# EAGLE board Clock (EAGLE 8.2.2)
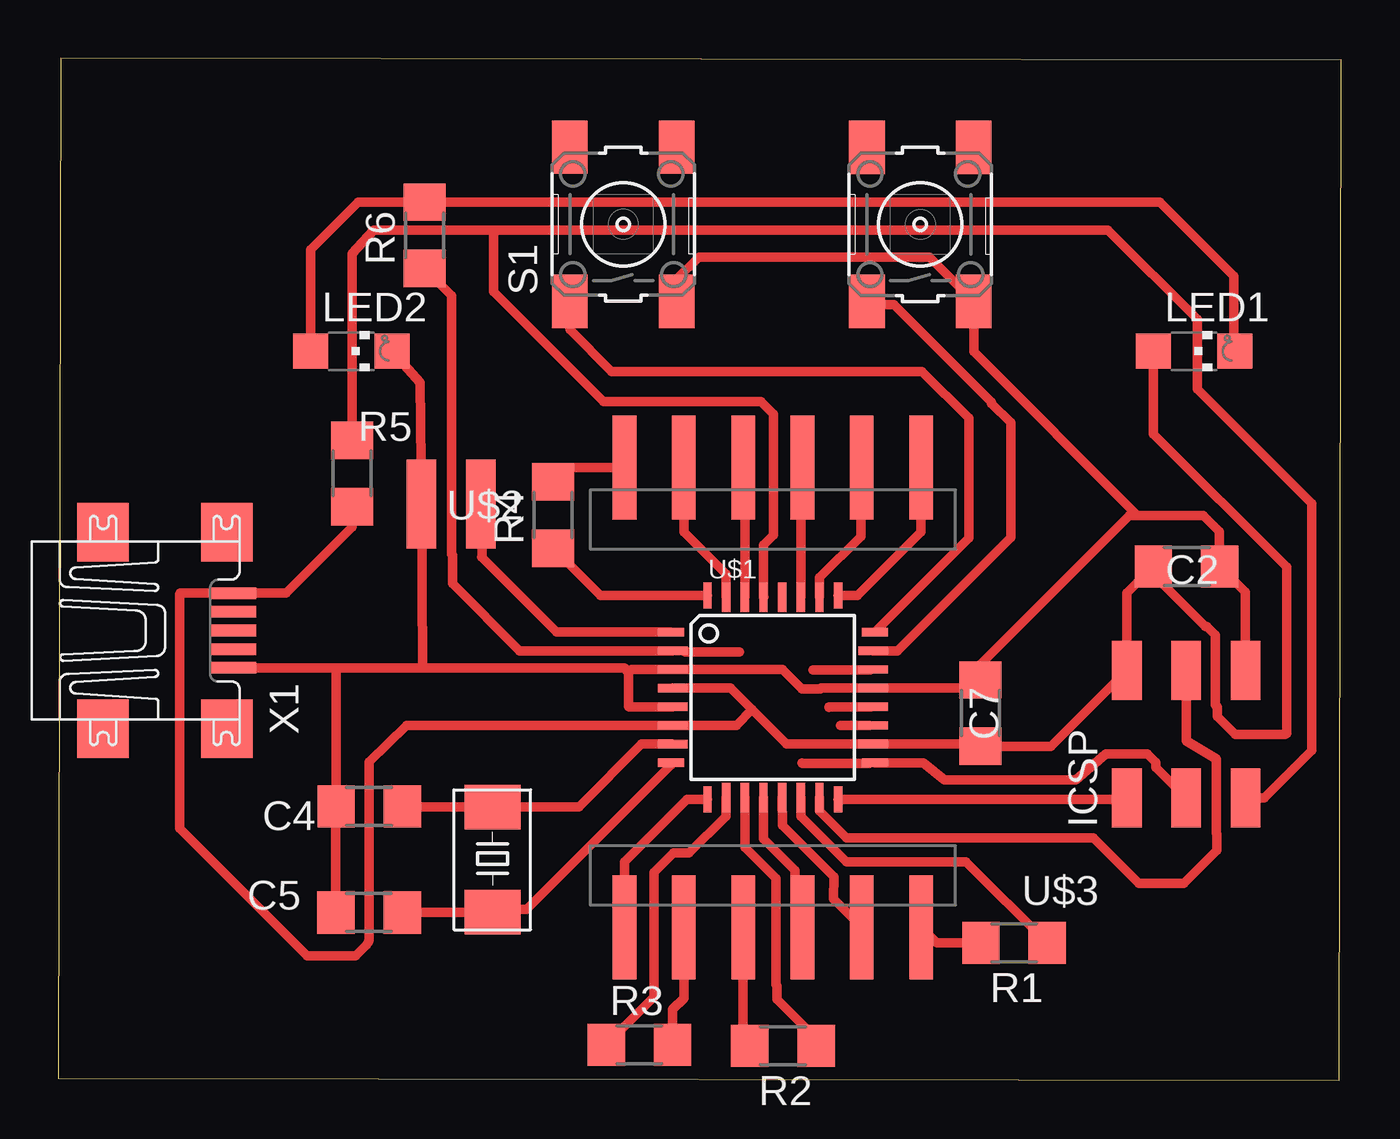
[diagram p0: board, top side]

Size 54.95 x 43.78 mm. Coordinates in mm from the lower left corner, seen from the top.
Outline: 0,0.09 54.87,0 54.95,43.71 0.1,43.79 0,0.09
Copper layers (1*16): Top 0.035mm / dielectric 1.5mm / Bottom 0.035mm
Design rules "default *": minimum track width 10mil, minimum drill 24mil, track to track 8mil, track to pad 8mil, pad to pad 8mil, via to via 8mil, smd to smd 8mil, copper to edge 40mil, drill to drill 8mil, minimum pad ring 12mil, minimum via ring 8mil, stop-mask expansion 4mil, vias tented up to drill 0mil, thermal gap 10mil
Net classes: 0 default: width 0.635 mm, clearance 0.406 mm; 1 power: width 0.635 mm, clearance 0.406 mm

## Footprints (pad centres in the part's own frame; a part is rotated, then mirrored left to right if it is on the bottom)
1206 = smd 1.6 x 1.803: 1 -1.422,0; 2 1.422,0
2X03SMD = smd 2.54 x 1.27: 1 -2.54,2.54; 2 2.92,2.54; 3 -2.54,0; 4 2.92,0; 5 -2.54,-2.54; 6 2.92,-2.54
CHIPLED_1206 = smd 1.5 x 1.5: A 0,-1.75; C 0,1.75
CS10 = smd 1.905 x 2.388: P$1 -2.286,0; P$2 2.21,0
R1206 = smd 1.6 x 1.803: 1 -1.422,0; 2 1.422,0
6MM_SWITCH = smd 2.286 x 1.524: 1 -3.302,2.286; 2 3.302,2.286; 3 -3.302,-2.286; 4 3.302,-2.286
TQFP32-08THIN = smd 1.118 x 0.356: 1 -4.369,2.8; 8 -4.369,-2.8; 17 4.369,-2.8; 24 4.369,2.8 | smd 1.27 x 0.356: 2 -4.293,2; 3 -4.293,1.2; 4 -4.293,0.4; 5 -4.293,-0.4; 6 -4.293,-1.2; 7 -4.293,-2; 18 4.293,-2; 19 4.293,-1.2; 20 4.293,-0.4; 21 4.293,0.4; 22 4.293,1.2; 23 4.293,2 | smd 0.356 x 1.118: 9 -2.8,-4.369; 16 2.8,-4.369; 25 2.8,4.369; 32 -2.8,4.369 | smd 0.356 x 1.27: 10 -2,-4.293; 14 1.2,-4.293; 15 2,-4.293; 26 2,4.293; 27 1.2,4.293; 31 -2,4.293 | smd 0.35 x 1.27: 11 -1.2,-4.293; 12 -0.4,-4.293; 13 0.4,-4.293; 28 0.4,4.293; 29 -0.4,4.293; 30 -1.2,4.293
HEADER = smd 1.016 x 4.445: 1 -6.35,2.223; 2 -3.81,2.223; 3 -1.27,2.223; 4 1.27,2.223; 5 3.81,2.223; 6 6.35,2.223
BUZZER = smd 1.27 x 3.81: P$1 -1.27,0; P$2 1.27,0
UX60A-MB-5ST = smd 2 x 0.5: 1 2.25,1.6; 2 2.25,0.8; 3 2.25,0; 4 2.25,-0.8; 5 2.25,-1.6 | smd 2.2 x 2.5: M1 -3.3,-4.2; M2 -3.3,4.2; M3 2,4.2; M4 2,-4.2

## Placement (x,y rotation side)
C2  10uF  [1206]  48.32,22.02 180 top
C4  18pF  [1206]  13.32,11.74 0 top
C5  18pF  [1206]  13.3,7.19 0 top
C7  .1uF  [1206]  39.5,15.74 270 top
ICSP  PROG  [2X03SMD]  48.31,14.65 90 top
LED1  AM  [CHIPLED_1206]  48.65,31.24 270 top
LED2  PM  [CHIPLED_1206]  12.56,31.24 270 top
Q2  16MHz  [CS10]  18.6,9.5 90 top
R1  [R1206]  40.94,5.89 180 top
R2  [R1206]  31.03,1.48 180 top
R3  [R1206]  24.88,1.53 0 top
R4  [R1206]  21.2,24.23 90 top
R5  10K  [1206]  12.58,26 270 top
R6  [R1206]  15.68,36.21 90 top
S0  HR  [6MM_SWITCH]  36.92,36.68 90 top
S1  MIN  [6MM_SWITCH]  24.2,36.68 90 top
U$1  ATMEGA88-THIN  [TQFP32-08THIN]  30.6,16.41 0 top
U$2  HEADER  [HEADER]  30.6,24.03 0 top
U$3  HEADER  [HEADER]  30.6,8.79 180 top
U$4  BUZZER  [BUZZER]  16.83,24.7 180 top
X1  MINI-USB-UX60A-MB-5ST  [UX60A-MB-5ST]  5.21,19.28 0 top

## Library data of the parts
C2 C4 C5 C7 Q2 R5 S0 S1 = ng
ICSP U$1 = fab
LED1 LED2 = led
R1-R4 R6 = resistor
U$2-U$4 = 4-Digit-Clock
X1 = con-hirose; OC_FARNELL: unknown; OC_NEWARK: unknown

## Nets
A0: S0.1 U$1.23
A1: S1.1 U$1.24
A2: U$1.25 U$2.6
A3: U$1.26 U$2.5
A4: U$1.27 U$2.4
A5: U$1.28
D0: U$1.30 U$2.3
D1: U$1.31 U$2.2
D2: R4.1 U$1.32
D3: U$1.1 U$4.P$1
D4: R6.1 U$1.2
D5: U$1.9 U$3.6
D6: R3.1 U$1.10
D7: R2.1 U$1.11
D8: U$1.12 U$3.3
D9: U$1.13 U$3.2
D10: R1.1 U$1.14
GND [power]: C2.1 C4.1 C5.1 C7.1 ICSP.6 LED2.C S0.3 S1.3 U$1.3 U$1.5 U$1.21 U$4.P$2 X1.5
MISO-D12: ICSP.1 U$1.16
MOSI-D11: ICSP.4 U$1.15
N$1: R1.2 U$3.1
N$2: R2.2 U$3.4
N$3: R3.2 U$3.5
N$4: R4.2 U$2.1
N$5: LED1.C LED2.A R6.2
PB6: C4.2 Q2.P$2 U$1.7
PB7: C5.2 Q2.P$1 U$1.8
RESET: ICSP.5 R5.1 U$1.29
SCK-D13: ICSP.3 U$1.17
VCC [power]: C2.2 C7.2 ICSP.2 LED1.A R5.2 U$1.4 U$1.6 U$1.18 X1.1

## Tracks (layer width: path | path; a pad name or v marks a point on that pad's centre or on a via)
A0
  Top 0.406: U$1.23 35.93,18.41 40.79,23.27 40.79,28.17 39.96,29 39.96,29.06 35.8,33.23 34.78,33.23 S0.1
A1
  Top 0.406: S1.1 21.91,32.16 23.7,30.37 36.99,30.37 38.99,28.37 38.99,23.23 U$1.24
A2
  Top 0.406: U$1.25 34.24,20.78 36.95,23.49 U$2.6
A3
  Top 0.406: U$1.26 32.6,21.54 34.37,23.31 34.37,26.21 U$2.5
A4
  Top 0.406: U$1.27 31.8,26.18 U$2.4
D0
  Top 0.406: U$1.30 29.4,26.18 U$2.3
D1
  Top 0.406: U$1.31 28.6,21.7 26.8,23.5 U$2.2
D2
  Top 0.406: U$1.32 23.22,20.78 R4.1
D3
  Top 0.406: U$4.P$1 18.16,22.45 18.13,22.42 21.34,19.21 U$1.1
D4
  Top 0.406: U$1.2 19.77,18.41 16.89,21.29 16.89,22.5 16.85,22.54 16.85,26.85 16.85,33.61 R6.1
D5
  Top 0.406: U$1.9 26.93,12.04 24.25,9.36 U$3.6
D6
  Top 0.406: U$1.10 28.6,11.32 27.02,9.74 26.35,9.74 25.52,8.91 25.52,3.59 R3.1
D7
  Top 0.406: R2.1 32.45,1.8 30.78,3.48 30.78,4.07 30.74,4.11 30.74,8.66 29.4,9.99 U$1.11
D8
  Top 0.406: U$1.12 30.2,10.34 31.55,8.99 31.55,6.89 U$3.3
D9
  Top 0.406: U$1.13 31.02,10.93 33.22,8.73 33.2,7.78 U$3.2
D10
  Top 0.406: U$1.14 31.8,11.32 33.75,9.37 38.88,9.37 R1.1
GND
  Top 0.406: ICSP.6 50.85,20.92 C2.1 49.73,22.04 49.73,23.52 49.05,24.2 46.22,24.2 | 46.22,24.2 45.87,24.2 39.5,17.82 C7.1 39.15,16.81 U$1.21 32.67,16.81 32.64,16.78 31.84,16.78 31.01,17.61 U$1.3 24.55,17.61 24.43,17.49 | C5.1 11.88,11.73 C4.1 11.9,17.56 11.78,17.68 | 24.43,17.49 24.43,16.02 24.44,16.01 U$1.5 | 11.78,17.68 X1.5 | 11.78,17.68 15.54,17.68 | 24.43,17.49 24.24,17.68 15.54,17.68 | S1.3 26.48,34.32 27.43,35.27 37.31,35.27 S0.3 39.2,31.22 46.22,24.2 | 15.54,17.68 15.61,17.72 U$4.P$2 15.5,29.9 LED2.C
MISO-D12
  Top 0.406: ICSP.1 45.7,12.04 U$1.16
MOSI-D11
  Top 0.406: U$1.15 32.6,11.55 33.75,10.39 44.34,10.39 46.28,8.45 48.21,8.45 49.63,9.87 49.63,10.56 49.6,10.58 49.6,13.78 48.32,14.55 48.32,17.04 ICSP.4
N$1
  Top 0.406: R1.2 37.63,5.89 U$3.1
N$2
  Top 0.406: U$3.4 29.33,1.76 R2.2
N$3
  Top 0.406: R3.2 26.31,3.04 26.8,3.53 U$3.5
N$4
  Top 0.406: U$2.1 21.8,26.25 R4.2
N$5
  Top 0.406: LED2.A 10.81,35.59 12.85,37.63 R6.2 47.18,37.63 50.35,34.45 50.35,31.29 LED1.C
N$6
  Top 0.406: 34.8,15.99 33.01,15.99 33,15.98
N$7
  Top 0.406: 34.75,15.21 33.5,15.21
N$11
  Top 0.406: 32.32,17.59 34.79,17.59
N$19
  Top 0.406: 26.85,18.36 29.17,18.36
N$21
  Top 0.406: 34.73,13.58 31.88,13.58 31.86,13.6
PB6
  Top 0.406: C4.2 14.76,11.71 Q2.P$2 18.61,11.73 22.29,11.73 24.97,14.41 U$1.7
PB7
  Top 0.406: U$1.8 26.23,13.52 20.05,7.34 18.72,7.34 | 18.72,7.34 Q2.P$1 | C5.2 18.57,7.19 18.72,7.34
RESET
  Top 0.406: 18.64,36.26 18.64,33.8 23.36,29.08 30.09,29.08 30.63,28.55 30.63,23.37 30.2,22.95 U$1.29 30.22,20.72 | 18.64,36.26 18.8,36.42 40.13,36.42 40.14,36.43 44.95,36.43 48.78,32.61 48.78,29.62 53.68,24.72 53.68,14.13 51.65,12.11 ICSP.5 | R5.1 12.58,35.41 13.51,36.43 18.7,36.43 18.64,36.26
SCK-D13
  Top 0.406: U$1.17 37.05,13.61 37.96,12.88 43.59,12.88 44.88,13.99 46.65,13.99 47.01,13.63 47.01,13.4 ICSP.3
VCC
  Top 0.406: 46.73,21.85 45.77,20.89 ICSP.2 42.52,14.32 C7.2 39.4,14.41 U$1.18 31.19,14.41 29.71,15.89 | 46.73,21.85 C2.2 | U$1.4 28.79,16.81 29.71,15.89 | 29.71,15.89 29.04,15.21 U$1.6 17.09,15.21 17.04,15.21 14.92,15.21 13.3,13.64 13.3,6.05 13.29,5.93 13.21,5.81 12.73,5.34 10.67,5.34 5.2,10.81 5.2,20.85 5.23,20.88 X1.1 9.75,20.88 12.58,23.7 R5.2 | LED1.A 46.9,27.7 52.61,21.99 52.61,14.87 52.55,14.82 50.41,14.82 50.41,14.83 49.64,15.6 49.64,16 49.55,16.09 49.55,19.09 49.19,19.45 49.13,19.45 46.73,21.85